# EAGLE board rev1 (EAGLE 7.2.0)
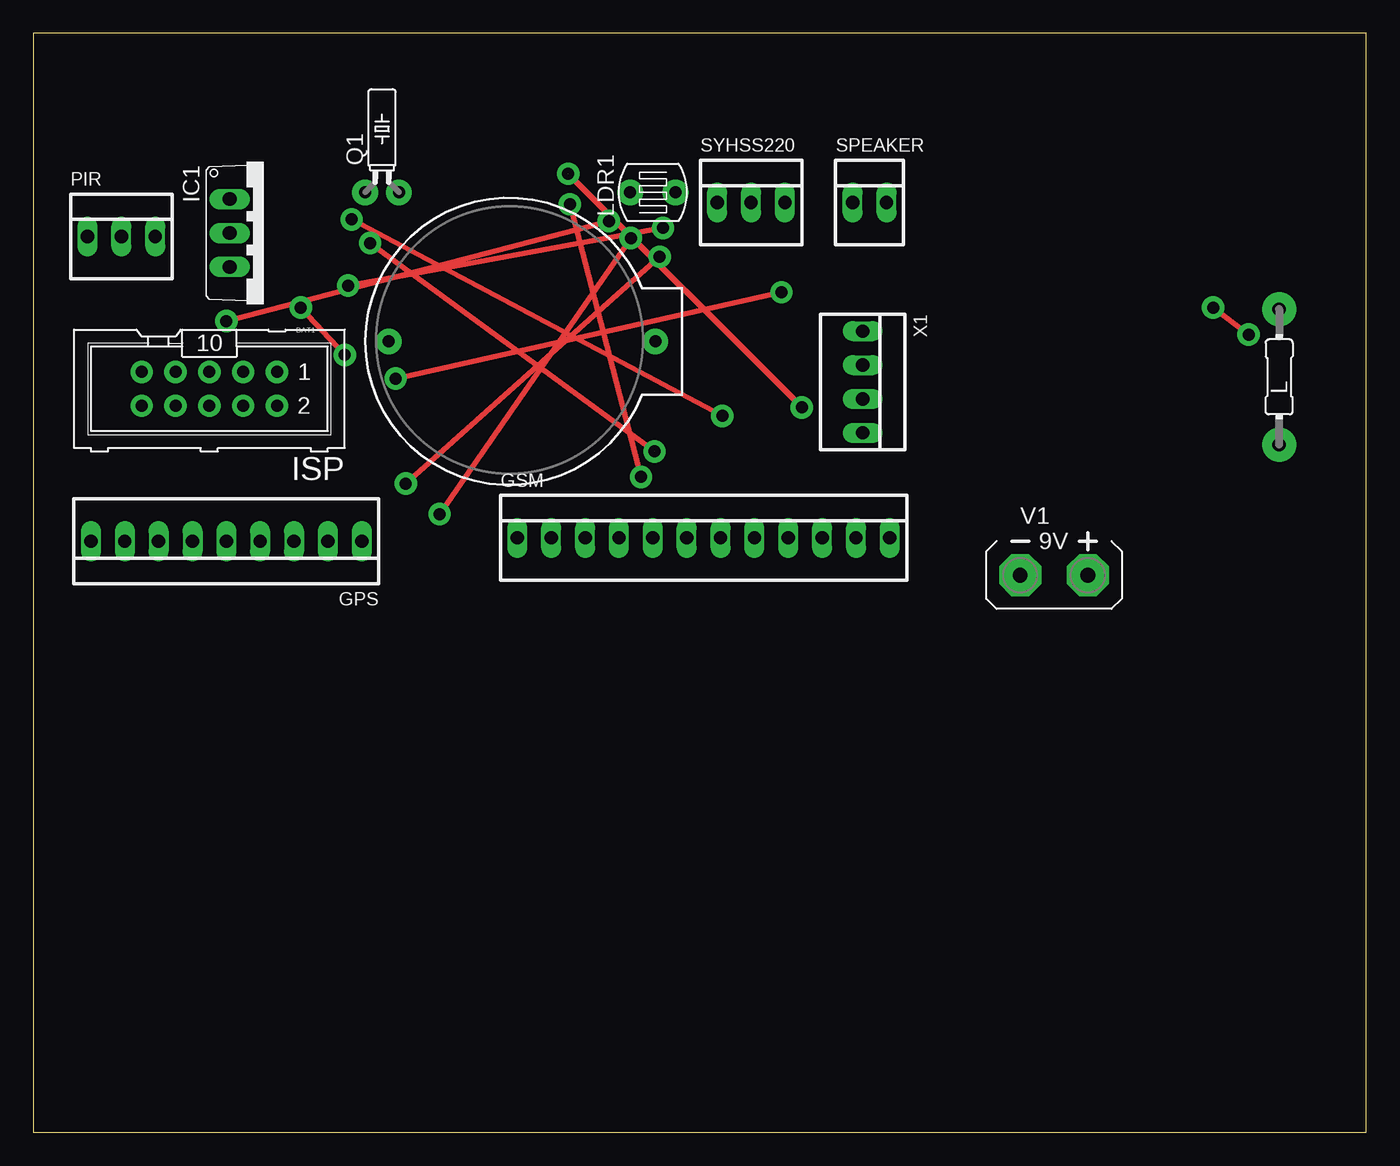
[diagram p0: board, top side]
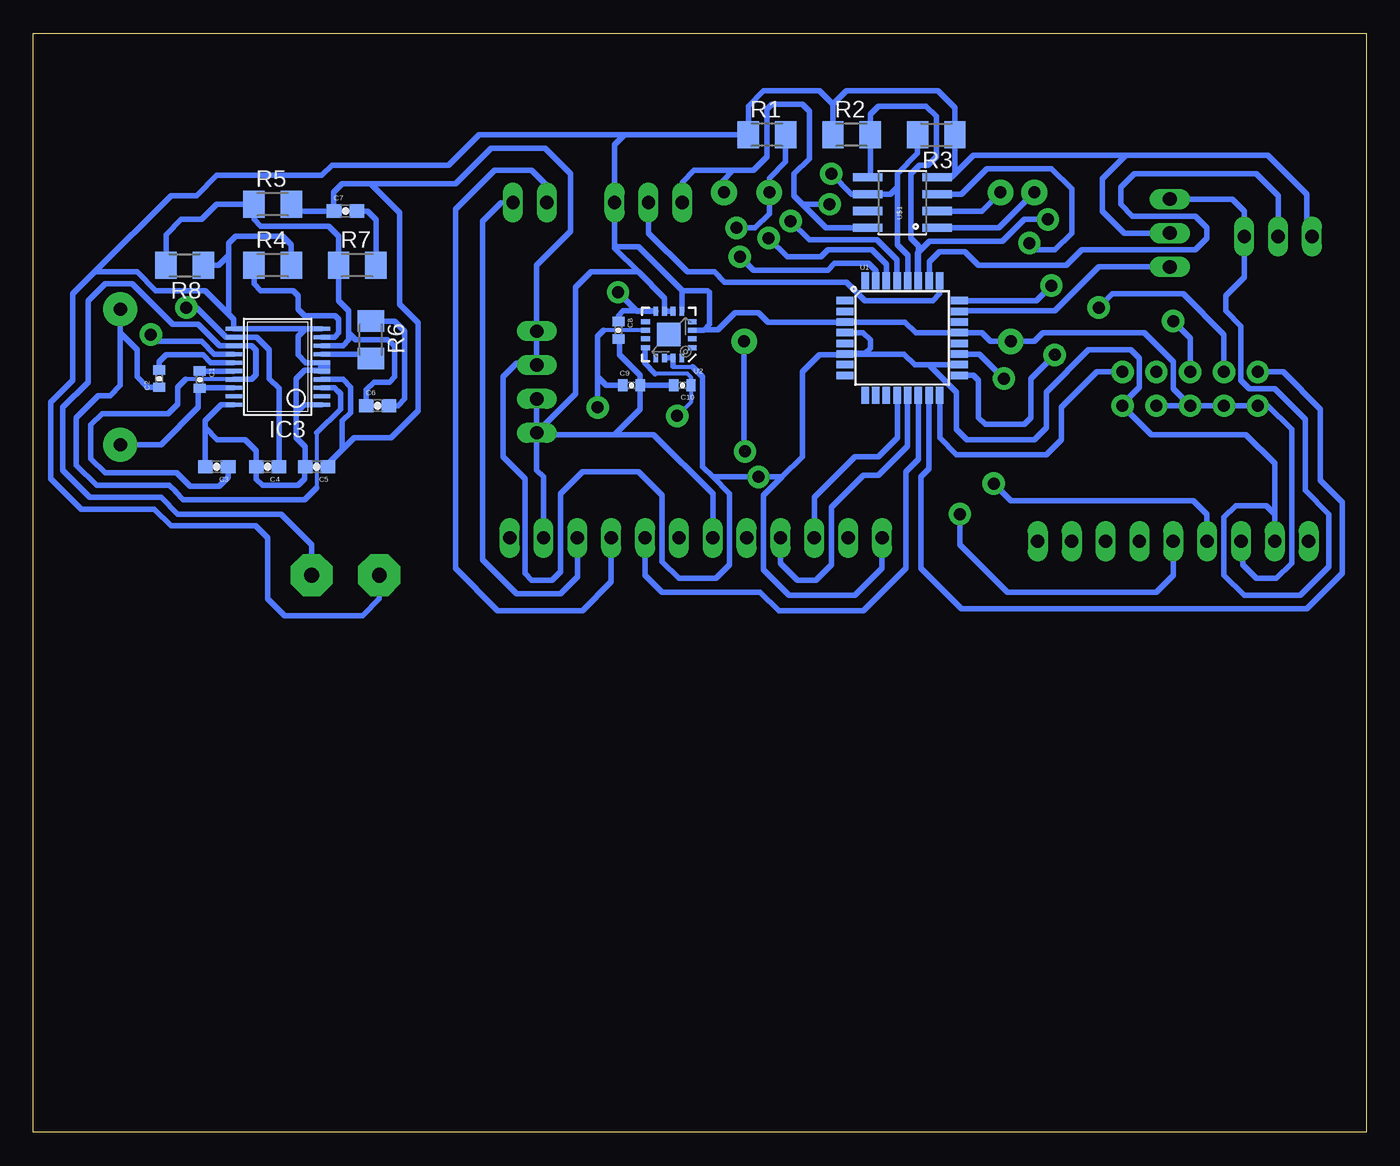
[diagram p1: board, bottom side, seen from below]

Size 100 x 82.41 mm. Coordinates in mm from the lower left corner, seen from the top.
Outline: 0,0 100,0 100,82.41 0,82.41 0,0
Copper layers (1*16): Top 0.035mm / dielectric 1.5mm / Bottom 0.035mm
Design rules "default": minimum track width 10mil, minimum drill 24mil, track to track 8mil, track to pad 8mil, pad to pad 8mil, via to via 8mil, smd to smd 8mil, copper to edge 40mil, drill to drill 8mil, minimum pad ring 10mil, minimum via ring 8mil, stop-mask expansion 4mil, vias tented up to drill 0mil, thermal gap 10mil

## Footprints (pad centres in the part's own frame; a part is rotated, then mirrored left to right if it is on the bottom)
BATTCOM_20MM_PTH = drill 0.9 pad 1.93: 1 20,0; 2 0,0
0402-CAP = smd 0.7 x 0.9: 1 -0.65,0; 2 0.65,0
0603-CAP = smd 1.1 x 1: 1 -0.85,0; 2 0.85,0
22-23-2091 = drill 1 long: 1 -10.16,0; 2 -7.62,0; 3 -5.08,0; 4 -2.54,0; 5 0,0; 6 2.54,0; 7 5.08,0; 8 7.62,0; 9 10.16,0
22-23-2121 = drill 1 long: 1 -13.97,0; 2 -11.43,0; 3 -8.89,0; 4 -6.35,0; 5 -3.81,0; 6 -1.27,0; 7 1.27,0; 8 3.81,0; 9 6.35,0; 10 8.89,0; 11 11.43,0; 12 13.97,0
TO220V = drill 1.016 long: 1 -2.54,-2.54; 2 0,-2.54; 3 2.54,-2.54
SSOP20 = smd 0.305 x 1.245: 1 -2.857,-3.302; 2 -2.222,-3.302; 3 -1.587,-3.302; 4 -0.952,-3.302; 5 -0.317,-3.302; 6 0.318,-3.302; 7 0.953,-3.302; 8 1.588,-3.302; 9 2.223,-3.302; 10 2.858,-3.302; 11 2.858,3.302; 12 2.223,3.302; 13 1.588,3.302; 14 0.953,3.302; 15 0.318,3.302; 16 -0.317,3.302; 17 -0.952,3.302; 18 -1.587,3.302; 19 -2.222,3.302; 20 -2.857,3.302
ML10 = drill 0.9 pad 1.676: 1 -5.08,-1.27; 2 -5.08,1.27; 3 -2.54,-1.27; 4 -2.54,1.27; 5 0,-1.27; 6 0,1.27; 7 2.54,-1.27; 8 2.54,1.27; 9 5.08,-1.27; 10 5.08,1.27
R0207/4 = drill 1 pad 2.54: 1 -5.08,0; 2 5.08,0
LDR338-54C = drill 0.9 pad 1.93: 1 0,1.702; 2 0,-1.702
22-23-2031 = drill 1 long: 1 -2.54,0; 2 0,0; 3 2.54,0
TC26H = drill 0.9 pad 1.93: 1 -1.27,0; 2 1.27,0
M1206 = smd 1.6 x 2: 1 -1.4,0; 2 1.4,0
M3216 = smd 1.6 x 2: 1 -1.4,0; 2 1.4,0
22-23-2021 = drill 1 long: 1 -1.27,0; 2 1.27,0
TQFP32-08 = smd 1.27 x 0.559: 1 -4.293,2.8; 2 -4.293,2; 3 -4.293,1.2; 4 -4.293,0.4; 5 -4.293,-0.4; 6 -4.293,-1.2; 7 -4.293,-2; 8 -4.293,-2.8; 17 4.293,-2.8; 18 4.293,-2; 19 4.293,-1.2; 20 4.293,-0.4; 21 4.293,0.4; 22 4.293,1.2; 23 4.293,2; 24 4.293,2.8 | smd 0.559 x 1.27: 9 -2.8,-4.293; 10 -2,-4.293; 11 -1.2,-4.293; 12 -0.4,-4.293; 13 0.4,-4.293; 14 1.2,-4.293; 15 2,-4.293; 16 2.8,-4.293; 25 2.8,4.293; 26 2,4.293; 27 1.2,4.293; 28 0.4,4.293; 29 -0.4,4.293; 30 -1.2,4.293; 31 -2,4.293; 32 -2.8,4.293
LFCSP-16 = smd 1.75 x 1.75: 0 0,0 | smd 0.65 x 0.37: 1 -1.75,0.975; 2 -1.75,0.325; 3 -1.75,-0.325; 4 -1.75,-0.975; 9 1.75,-0.975; 10 1.75,-0.325; 11 1.75,0.325; 12 1.75,0.975 | smd 0.37 x 0.65: 5 -0.975,-1.75; 6 -0.325,-1.75; 7 0.325,-1.75; 8 0.975,-1.75; 13 0.975,1.75; 14 0.325,1.75; 15 -0.325,1.75; 16 -0.975,1.75
SO08 = smd 0.61 x 2.21: 1 -1.905,-2.616; 2 -0.635,-2.616; 3 0.635,-2.616; 4 1.905,-2.616; 5 1.905,2.616; 6 0.635,2.616; 7 -0.635,2.616; 8 -1.905,2.616
AB9V = drill 1.118 pad 3.15 octagon: + 0,2.54; - 0,-2.54
22-23-2041 = drill 1 long: 1 -3.81,0; 2 -1.27,0; 3 1.27,0; 4 3.81,0

## Placement (x,y rotation side)
BAT1  [BATTCOM_20MM_PTH]  26.67,59.31 0 top
C1  0.1uF  [0402-CAP]  87.5,56.44 270 bottom
C2  0.1uF  [0402-CAP]  90.55,56.52 90 bottom
C3  4.7uF  [0603-CAP]  86.23,49.91 180 bottom
C4  4.7uF  [0603-CAP]  82.42,49.91 180 bottom
C5  47uF  [0603-CAP]  78.74,49.91 180 bottom
C6  3.3nF  [0603-CAP]  74.17,54.48 0 bottom
C7  33pF  [0603-CAP]  76.58,69.09 0 bottom
C8  0.1uF  [0402-CAP]  56.11,60.15 270 bottom
C9  0.1uF  [0402-CAP]  55.12,56.01 0 bottom
C10  0.1uF  [0402-CAP]  51.31,56.01 180 bottom
GPS  22-23-2091  [22-23-2091]  14.48,44.32 180 top
GSM  22-23-2121  [22-23-2121]  50.29,44.58 0 top
IC1  LM35DT  [TO220V]  17.27,67.44 270 top
IC3  PLL1700E  [SSOP20]  81.66,57.4 90 bottom
ISP  [ML10]  13.21,55.75 180 top
L  10uH  [R0207/4]  93.47,56.64 90 top
LDR1  [LDR338-54C]  46.48,70.48 90 top
PIR  22-23-2031  [22-23-2031]  6.6,67.18 0 top
Q1  [TC26H]  26.16,70.48 0 top
R1  10Kohm  [M1206]  44.96,74.8 0 bottom
R2  4.7Kohm  [M1206]  38.61,74.8 0 bottom
R3  4.7Kohm  [M1206]  32.26,74.8 180 bottom
R4  47K  [M3216]  82.04,65.02 0 bottom
R5  1M  [M3216]  82.04,69.6 0 bottom
R6  60.4Kohm  [M3216]  74.68,59.44 270 bottom
R7  15Kohm  [M1206]  75.69,65.02 0 bottom
R8  249Kohm  [M1206]  88.65,65.02 180 bottom
SPEAKER  22-23-2021  [22-23-2021]  62.74,69.72 0 top
SYHSS220  22-23-2031  [22-23-2031]  53.85,69.72 0 top
U1  ATMEGA328P_TQFP  [TQFP32-08]  34.8,59.56 0 bottom
U2  ADXL335  [LFCSP-16]  52.32,59.82 180 bottom
U$1  DS1307SO8  [SO08]  34.8,69.72 90 bottom
V1  9VBATTERY  [AB9V]  76.58,41.78 270 top
X1  22-23-2041  [22-23-2041]  62.23,56.26 270 top

## Library data of the parts
BAT1 C5 U$1 = SparkFun
C1 C2 C8-C10 = SparkFun-Capacitors; PROD_ID: CAP-12416
C3 C4 = SparkFun-Capacitors; PROD_ID: CAP-08280
C6 = SparkFun-Capacitors; PROD_ID: CAP-09633
C7 = SparkFun-Capacitors; PROD_ID: CAP-10142
GPS = con-molex; MF: MOLEX; MPN: 22-23-2091; OC_FARNELL: 1756827; OC_NEWARK: 56H0450
GSM = con-molex; MF: MOLEX; MPN: 22-23-2121; OC_FARNELL: 1462935; OC_NEWARK: 56H0456
IC1 = lm35
IC3 = texas; MF: TEXAS INSTRUMENT CONNECTORS; MPN: PLL1700E; OC_FARNELL: unknown; OC_NEWARK: 36K3452
ISP = con-harting-ml; OC_FARNELL: unknown; OC_NEWARK: unknown
L LDR1 = gm-resistors
PIR SYHSS220 = con-molex; MF: MOLEX; MPN: 22-23-2031; OC_FARNELL: 1462950; OC_NEWARK: 30C0862
Q1 = crystal; OC_FARNELL: unknown; OC_NEWARK: unknown
R1-R8 = resistor
SPEAKER = con-molex; MF: MOLEX; MPN: 22-23-2021; OC_FARNELL: 1462926; OC_NEWARK: 25C3832
U1 = SparkFun-DigitalIC; PROD_ID: IC-09069
U2 = SparkFun-Sensors
V1 = gm-supply
X1 = con-molex; MF: MOLEX; MPN: 22-23-2041; OC_FARNELL: 1462920; OC_NEWARK: 38C0355

## Nets
GND: BAT1.2 C3.2 C4.2 C5.2 C8.2 C9.2 C10.2 GPS.7 GSM.6 GSM.11 IC1.2 IC3.1 IC3.5 IC3.6 IC3.10 IC3.11 IC3.20 ISP.4 ISP.6 ISP.8 ISP.10 PIR.1 R1.1 R2.1 R3.1 R4.2 R8.1 SYHSS220.3 U1.3 U1.21 U2.3 U2.5 U2.6 U2.7 U$1.4 V1.- X1.3 X1.4
N$3: GPS.5 U1.30
N$4: IC1.3 U1.23
N$5: LDR1.1 R1.2 U1.24
N$6: GPS.6 U1.31
N$7: SYHSS220.2 U1.25
N$8: PIR.2 U1.26
N$9: C8.1 U1.19 U2.8
N$10: C9.1 R3.2 U1.28 U2.10 U$1.6
N$11: GSM.3 U1.12
N$12: Q1.1 U$1.1
N$13: Q1.2 U$1.2
N$14: GSM.4 U1.13
N$15: BAT1.1 U$1.3
N$16: GSM.8 U1.14
N$17: GSM.10 SPEAKER.2
N$18: GSM.9 SPEAKER.1
N$20: ISP.1 U1.16
N$21: ISP.5 U1.29
N$22: ISP.7 U1.17
N$23: ISP.9 U1.15
N$29: C1.1 IC3.16
N$32: C2.2 IC3.15
N$35: C1.2 IC3.18 L.1
N$36: C2.1 IC3.3 L.2
N$37: C5.1 C7.1 GPS.8 GSM.1 IC1.1 IC3.4 ISP.2 LDR1.2 PIR.3 R5.2 SYHSS220.1 U1.4 U1.6 U1.18 U2.14 U2.15 U$1.8 X1.1 X1.2
N$38: C6.1 IC3.8 R5.1 R7.1 R8.2
N$39: C3.1 IC3.13 IC3.17 V1.+
N$40: C6.2 R6.1
N$41: IC3.7 R6.2
N$42: C10.1 R2.2 U1.27 U2.12 U$1.5
N$43: C7.2 R7.2
N$44: C4.1 IC3.12 IC3.14
N$45: IC3.9 R4.1

## Tracks (layer width: path | path; a pad name or v marks a point on that pad's centre or on a via)
GND
  Bottom 0.406: ISP.6 ISP.8 ISP.10 7.37,54.48 5.59,52.7 5.59,42.67 6.73,41.53 8.26,41.53 9.27,42.55 9.27,44.2 GPS.7 | ISP.6 ISP.4 | X1.4 62.23,52.32 | 62.23,52.32 62.23,49.66 61.72,49.15 GSM.11 | C9.2 C10.2 51.82,55.87 | GSM.6 49.02,47.88 53.47,52.32 56.39,52.32 | C9.2 54.47,56.75 56.01,58.29 56.01,59.4 C8.2 | X1.3 X1.4 | 62.23,52.32 56.39,52.32 | 56.39,52.32 54.48,54.23 54.48,55.99 C9.2 | 55.63,74.8 R1.1 46.36,76.96 45.21,78.1 41.02,78.1 40.01,77.09 R2.1 40.01,77.09 38.99,78.1 32.13,78.1 30.86,76.84 R3.1 | R3.1 | R3.1 30.86,71.88 | 30.86,71.88 31.11,71.63 U$1.4 | 54.61,64.52 52.65,62.55 U2.7 U2.6 | 54.61,64.52 56.39,66.29 56.39,66.55 | 56.39,66.55 SYHSS220.3 56.39,74.04 55.63,74.8 | U2.5 51.35,62.99 | 51.35,62.99 51.35,63.16 54.61,66.42 56.26,66.42 56.39,66.55 | U2.3 49.71,60.14 49.66,60.2 | 51.35,62.99 51.22,63.12 49.4,63.12 49.28,62.99 49.28,60.58 49.66,60.2 | X1.4 59.31,55.37 59.31,63.37 58.17,64.52 54.61,64.52 | IC1.2 18.16,67.44 19.81,69.09 19.81,71.5 18.03,73.28 | 18.03,73.28 7.37,73.28 4.45,70.36 4.45,67.56 PIR.1 | 78.36,57.66 IC3.6 78.42,57.72 | 80.26,53.98 80.26,52.07 79.59,51.4 C5.2 79.63,49.87 79.63,49.02 80.14,48.51 82.8,48.51 83.27,48.98 C4.2 83.27,51.09 84.12,51.94 86.21,51.94 87.12,52.86 | IC3.10 79.56,60.26 | 79.56,60.26 80.14,59.69 80.14,58.29 79.57,57.72 78.42,57.72 | R8.1 86.11,65.02 85.34,65.79 | 79.56,60.26 IC3.11 84.96,60.96 85.15,61.15 85.34,61.34 | R4.2 80.64,66.55 81.28,67.18 84.84,67.18 85.34,66.67 85.34,65.79 | IC3.1 79.69,54.55 80.26,53.98 | 80.26,53.98 80.26,56.52 79.63,57.15 78.42,57.15 IC3.5 78.36,57.66 | 78.42,57.72 78.36,57.66 | IC3.20 85.92,54.55 87.12,53.34 87.12,52.86
  Bottom 0.406: 87.12,52.86 87.12,49.95 C3.2 | BAT1.2 26.54,59.31 | ISP.6 14.48,55.75 14.48,57.78 16.64,59.94 24.26,59.94 24.89,59.31 BAT1.2 | 49.66,60.2 48.64,60.2 47.37,61.47 45.59,61.47 44.89,60.76 U1.3 34.6,60.76 33.78,59.94 30.52,59.94 U1.21 28.85,59.96 28.19,59.31 BAT1.2 | 95.38,64.52 92.2,64.52 90.81,63.12 87.12,63.12 85.34,61.34 | V1.- 74.04,40.01 75.31,38.73 81.15,38.73 82.42,40.01 82.42,44.58 83.31,45.47 89.66,45.47 90.93,46.74 96.39,46.74 98.68,49.02 98.68,54.74 97.03,56.39 97.03,62.87 95.38,64.52 | 95.38,64.52 89.66,70.23 87.76,70.23 86.23,71.75 78.36,71.75 77.6,72.52 68.83,72.52 66.55,74.8 55.63,74.8 | 18.03,73.28 29.46,73.28 30.86,71.88 | 85.34,65.79 85.34,61.34
N$1  (via drill 0.9 pad 1.68)
  other vias: 23.37,58.29
N$3  (via drill 0.9 pad 1.68)
  Top 0.406: v30.48,46.36 v44.83,67.06
  Bottom 0.406: GPS.5 14.48,41.78 15.75,40.51 26.92,40.51 30.48,44.07 v30.48,46.36 | U1.30 36,65.08 37.08,66.17 40.39,66.17 40.89,65.66 43.43,65.66 v44.83,67.06
N$4
  Bottom 0.406: IC1.3 20.07,64.9 23.37,61.59 30.47,61.59 U1.23
N$5  (via drill 0.9 pad 1.68)
  Top 0.406: v23.62,63.5 v47.24,67.82
  Bottom 0.406: 43.18,74.42 R1.2 | 43.69,74.67 R1.2 | R1.2 43.56,72.77 44.78,71.55 LDR1.1 44.78,68.88 45.85,67.82 v47.24,67.82 47.37,67.82 | U1.24 24.76,62.36 v23.62,63.5
N$6  (via drill 0.9 pad 1.68)
  Top 0.406: v27.94,48.64 v46.99,65.66
  Bottom 0.406: GPS.6 11.94,46.36 12.95,47.37 26.67,47.37 v27.94,48.64 | U1.31 36.8,64.61 37.34,65.15 39.88,65.15 40.39,64.64 45.97,64.64 v46.99,65.66
N$7
  Bottom 0.406: SYHSS220.2 53.85,67.44 50.93,64.52 48.9,64.52 48.13,63.75 38.99,63.75 37.59,62.36 32.51,62.36 32,62.87 U1.25
N$8
  Bottom 0.406: PIR.2 6.6,70.23 8.26,71.88 17.4,71.88 18.41,70.87 18.41,69.6 17.53,68.71 12.83,68.71 11.94,67.82 11.94,67.06 12.83,66.17 21.34,66.17 22.48,65.02 29.08,65.02 30.1,66.04 32,66.04 32.77,65.28 32.77,63.89 U1.26
N$9  (via drill 0.9 pad 1.68)
  Top 0.406: v56.13,62.99 v27.18,56.52
  Bottom 0.406: C8.1 56.11,61.24 55.75,61.59 53.33,61.59 U2.8 54.71,61.57 v56.13,62.99 | U1.19 29.03,58.36 v27.18,56.52
N$10  (via drill 0.9 pad 1.68)  (1 unrouted)
  Top 0.406: v57.66,54.36 40.13,71.88
  Bottom 0.305: U2.10 57.21,60.14
  Bottom 0.406: C9.1 57.02,56.01 57.66,56.64 | 57.66,56.64 57.66,59.69 57.21,60.14 | R3.2 33.66,73.4 35.18,71.88 35.18,70.87 | 34.42,63.88 U1.28 34.4,65.77 35.18,66.55 35.18,70.87 | 35.18,70.87 35.69,70.36 U$1.6 38.61,70.36 40.13,71.88 | 57.66,56.64 v57.66,54.36
N$11
  Bottom 0.406: GSM.3 41.4,47.62 38.35,50.67 36.58,50.67 35.18,52.07 35.18,55.25 U1.12
N$12
  Bottom 0.406: U$1.1 27.56,67.82 Q1.1
N$13
  Bottom 0.406: U$1.2 28.83,69.09 Q1.2
N$14
  Bottom 0.406: GSM.4 43.94,42.67 42.67,41.4 41.27,41.4 40.13,42.55 40.13,46.86 37.72,49.28 36.58,49.28 34.42,51.44 34.42,55.25 U1.13
N$15  (via drill 0.9 pad 1.68)  (1 unrouted)
  Top 0.406: 46.61,51.05 v25.27,66.67
  Bottom 0.406: U$1.3 30.35,70.36 28.45,72.26 23.62,72.26 22.1,70.74 22.1,67.44 23.37,66.17 24.77,66.17 v25.27,66.67 | BAT1.1 46.67,51.12 46.61,51.05
N$16
  Bottom 0.406: U1.14 33.6,50.48 34.54,49.53 34.54,42.29 37.72,39.12 44.07,39.12 45.47,40.51 52.83,40.51 54.1,41.78 GSM.8 54.1,43.05
N$17
  Bottom 0.406: GSM.10 59.18,41.66 60.45,40.39 63.75,40.39 66.29,42.93 66.29,68.33 64.9,69.72 SPEAKER.2
N$18
  Bottom 0.406: GSM.9 56.64,41.27 58.8,39.12 65.15,39.12 68.33,42.29 68.33,69.22 65.41,72.14 62.61,72.14 61.47,70.99 SPEAKER.1
N$20
  Bottom 0.406: U1.16 32,52.06 30.73,50.8 24,50.8 22.86,51.94 22.86,54.36 20.19,57.02 ISP.1
N$21  (via drill 0.9 pad 1.68)
  Top 0.406: v14.48,60.83 v43.18,68.33
  Bottom 0.406: 35.18,63.84 U1.29 35.2,65.42 36.7,66.93 41.78,66.93 v43.18,68.33 | ISP.5 13.21,59.56 v14.48,60.83
N$22  (via drill 0.9 pad 1.68)  (1 unrouted)
  Top 0.406: 23.37,58.29 v20.07,61.85
  Bottom 0.406: ISP.7 10.67,59.82 13.72,62.87 19.05,62.87 v20.07,61.85 | 23.37,58.29 25.15,56.52 25.15,53.59 25.65,53.09 28.57,53.09 29.08,53.59 29.08,56.39 29.46,56.77 30.5,56.77 U1.17
N$23
  Bottom 0.406: ISP.9 6.22,57.02 3.43,54.23 3.43,48.89 1.78,47.24 1.78,41.91 4.45,39.24 30.35,39.24 33.4,42.29 33.4,49.15 32.8,49.75 U1.15
N$24  (via drill 0.9 pad 1.68)
  other vias: 46.61,51.05
N$25  (via drill 0.9 pad 1.68)
  other vias: 40.13,71.88
N$29
  Bottom 0.406: 87.55,57.09 C1.1 IC3.16
N$32
  Bottom 0.406: IC3.15 86.68,57.72 87.25,58.29 90.04,58.29 90.55,57.78 C2.2
N$35
  Bottom 0.406: 87.58,55.82 C1.2 | L.1 90.42,51.56 87.63,54.36 87.63,55.66 C1.2 | IC3.18 87.47,55.82 C1.2
N$36
  Bottom 0.305: 78.74,52.45 78.74,48.34
  Bottom 0.406: 77.17,55.58 76.96,55.37 | 76.96,55.37 76.96,54.23 78.74,52.45 | L.2 93.47,59.94 | 93.47,59.94 92.2,58.67 92.2,56.64 91.44,55.88 90.57,55.88 C2.1 | IC3.3 77.41,55.82 77.17,55.58 | 77.17,55.58 77.14,55.58 76.96,55.4 76.96,55.37 | 78.74,48.34 79.63,47.45 88.75,47.45 89.33,48.03 89.33,48.06 89.79,48.51 95.25,48.51 96.77,50.04 96.77,53.59 95.12,55.25 94.23,55.25 93.47,56.01 93.47,59.94
N$37  (via drill 0.9 pad 1.68)
  Top 0.406: v45.59,49.15 v40.26,69.6
  Bottom 0.305: 52,57.46 51.94,57.4 50.55,57.4
  Bottom 0.406: U2.14 U2.15 52,57.46 | GSM.1 36.32,42.29 38.35,40.26 43.31,40.26 45.21,42.16 45.21,47.75 43.81,49.15 | 39.16,58.29 41.02,58.29 42.29,57.02 42.29,50.67 43.81,49.15 | 39.16,58.29 U1.6 | 50.55,57.4 49.78,56.64 49.78,49.91 49.02,49.15 | GPS.8 6.86,46.36 | 6.86,46.36 6.86,50.16 9.02,52.32 16.13,52.32 ISP.2 18.29,54.61 17.02,55.88 17.02,58.04 17.65,58.67 20.83,58.67 24,55.5 24,52.83 24.89,51.94 29.97,51.94 30.73,52.7 30.73,55.5 32.8,57.56 | 49.02,49.15 47.75,47.88 47.75,42.55 48.77,41.53 51.56,41.53 52.83,42.8 52.83,47.75 54.61,49.53 58.8,49.53 60.45,47.88 60.45,42.04 61.09,41.4 62.61,41.4 63.12,41.91 63.12,49.02 64.77,50.67 64.77,56.64 63.75,57.66 62.36,57.66 X1.2 X1.1 62.23,65.02 59.69,67.56 59.69,71.88 61.59,73.79 65.66,73.79 68.33,71.12 74.68,71.12 | IC1.1 10.03,69.98 9.14,69.09 PIR.3 9.14,64.14 10.54,62.74 10.54,61.59 9.4,60.45 9.4,56.39 8.76,55.75 6.86,55.75 4.57,53.47 4.57,48.13 2.79,46.36 2.79,42.42 4.95,40.26 9.14,40.26 10.67,41.78 10.67,46.1 9.78,46.99 7.49,46.99 6.86,46.36 | C5.1 77.89,50.13 76.83,51.18 | IC3.4 76.77,56.45 76.2,55.88 76.2,53.98 76.83,53.34 76.83,51.18 | R5.2 80.13,69.09 C7.1 77.47,69.13 77.47,70.48 76.83,71.12 74.68,71.12 | 76.83,51.18 75.95,52.07 73.15,52.07 71.12,54.1 71.12,60.71 72.52,62.1 72.52,68.96 74.68,71.12 | U1.6 37.65,58.36 37.59,58.42 | U1.6 34.67,58.36 33.87,57.56 32.8,57.56 | U1.18 32.8,57.56 | 47.5,72.14 45.97,72.14 44.96,73.15 44.96,76.71 44.58,77.09 42.29,77.09 41.78,76.58 41.78,73.03 42.93,71.88 42.93,70.23 42.29,69.6 | LDR1.2 48.26,70.56 48.26,71.37 47.5,72.14 | 47.5,72.14 50.42,72.14 51.31,71.25 SYHSS220.1
  Bottom 0.406: U$1.8 40.51,67.82 42.29,69.6 | 42.29,69.6 v40.26,69.6 | U1.4 37.74,59.96 37.21,59.44 37.21,58.8 37.59,58.42 | 37.59,58.42 38.86,58.42 38.99,58.29 39.16,58.29 | 43.81,49.15 v45.59,49.15 49.02,49.15
N$38
  Bottom 0.406: R8.2 90.04,67.31 88.9,68.45 87.38,68.45 86.23,69.6 R5.1 83.44,68.45 82.93,67.94 77.85,67.94 77.09,67.19 R7.1 77.09,62.36 76.33,61.59 76.33,59.94 | 76.33,59.94 75.82,59.44 73.41,59.44 72.9,58.93 72.9,56.64 73.28,56.26 74.42,56.26 75.02,55.66 C6.1 | 76.33,59.94 76.33,59.44 76.77,58.99 IC3.8
N$39
  Bottom 0.305: IC3.17 88.58,56.45
  Bottom 0.406: IC3.13 83.63,58.99 83.62,58.98 | 83.31,58.67 83.29,58.65 83.29,56.82 83.65,56.45 IC3.17 83.63,56.45 83.31,56.77 83.31,58.67 | 88.58,56.45 89.15,55.88 89.15,54.61 89.86,53.9 94.84,53.9 95.68,53.06 95.68,50.52 94.61,49.45 89.23,49.45 88.21,48.44 86.06,48.44 85.38,49.11 C3.1 | V1.+ 79.12,44.07 81.41,46.36 89.15,46.36 90.42,47.62 95.76,47.62 97.79,49.66 97.79,54.36 95.89,56.26 95.89,62.36 94.61,63.63 92.58,63.63 89.53,60.58 87.63,60.58 86.03,58.98 83.62,58.98 | 83.31,58.67 83.62,58.98
N$40
  Bottom 0.406: R6.1 72.9,60.83 72.14,60.07 72.14,54.99 72.64,54.48 C6.2
N$41
  Bottom 0.406: IC3.7 75,58.36 R6.2
N$42  (via drill 0.9 pad 1.68)
  Top 0.406: v51.69,53.72 v23.88,68.45
  Bottom 0.305: C10.1 50.66,56.63 | 50.66,56.63 50.93,56.9 53.34,56.9 | 50.66,56.63 50.67,56.61 50.67,54.74 v51.69,53.72
  Bottom 0.406: U$1.5 37.21,71.83 R2.2 37.21,76.33 36.58,76.96 33.02,76.96 32.26,76.2 32.26,73.15 32.89,72.52 33.53,72.52 34.16,71.88 34.16,67.06 33.6,66.49 U1.27 33.66,63.91 33.66,65.91 32.77,66.8 27.3,66.8 25.65,68.45 v23.88,68.45 | 53.34,56.9 54.1,57.66 54.1,58.81 U2.12
N$43
  Bottom 0.406: R7.2 74.29,68.45 74.93,69.09 C7.2
N$44  (via drill 0.9 pad 1.68)
  Top 0.406: v88.52,61.85 v91.19,59.82
  Bottom 0.406: C4.1 81.57,55.79 82.3,56.52 82.3,58.67 83.25,59.63 IC3.12 85.53,59.63 87.76,61.85 v88.52,61.85 | IC3.14 86.42,58.36 87.38,59.31 90.68,59.31 v91.19,59.82
N$45
  Bottom 0.406: IC3.9 77.41,59.63 77.09,59.94 77.09,60.96 77.34,61.21 79.63,61.21 80.14,61.72 80.14,62.74 80.52,63.12 82.93,63.12 83.44,63.63 R4.1
(copper drawn outside any net)
  shapes: Bottom area x1